# Altium PCB PCB1.PcbDoc
Units mm, origin at the board's own origin, x right, y up, seen from the top; angles counter-clockwise.
Board outline 166.15 x 92.4 mm, 2 copper layers (Top Layer, Bottom Layer); 64 components, 38 nets, 182 pads, 0 vias.
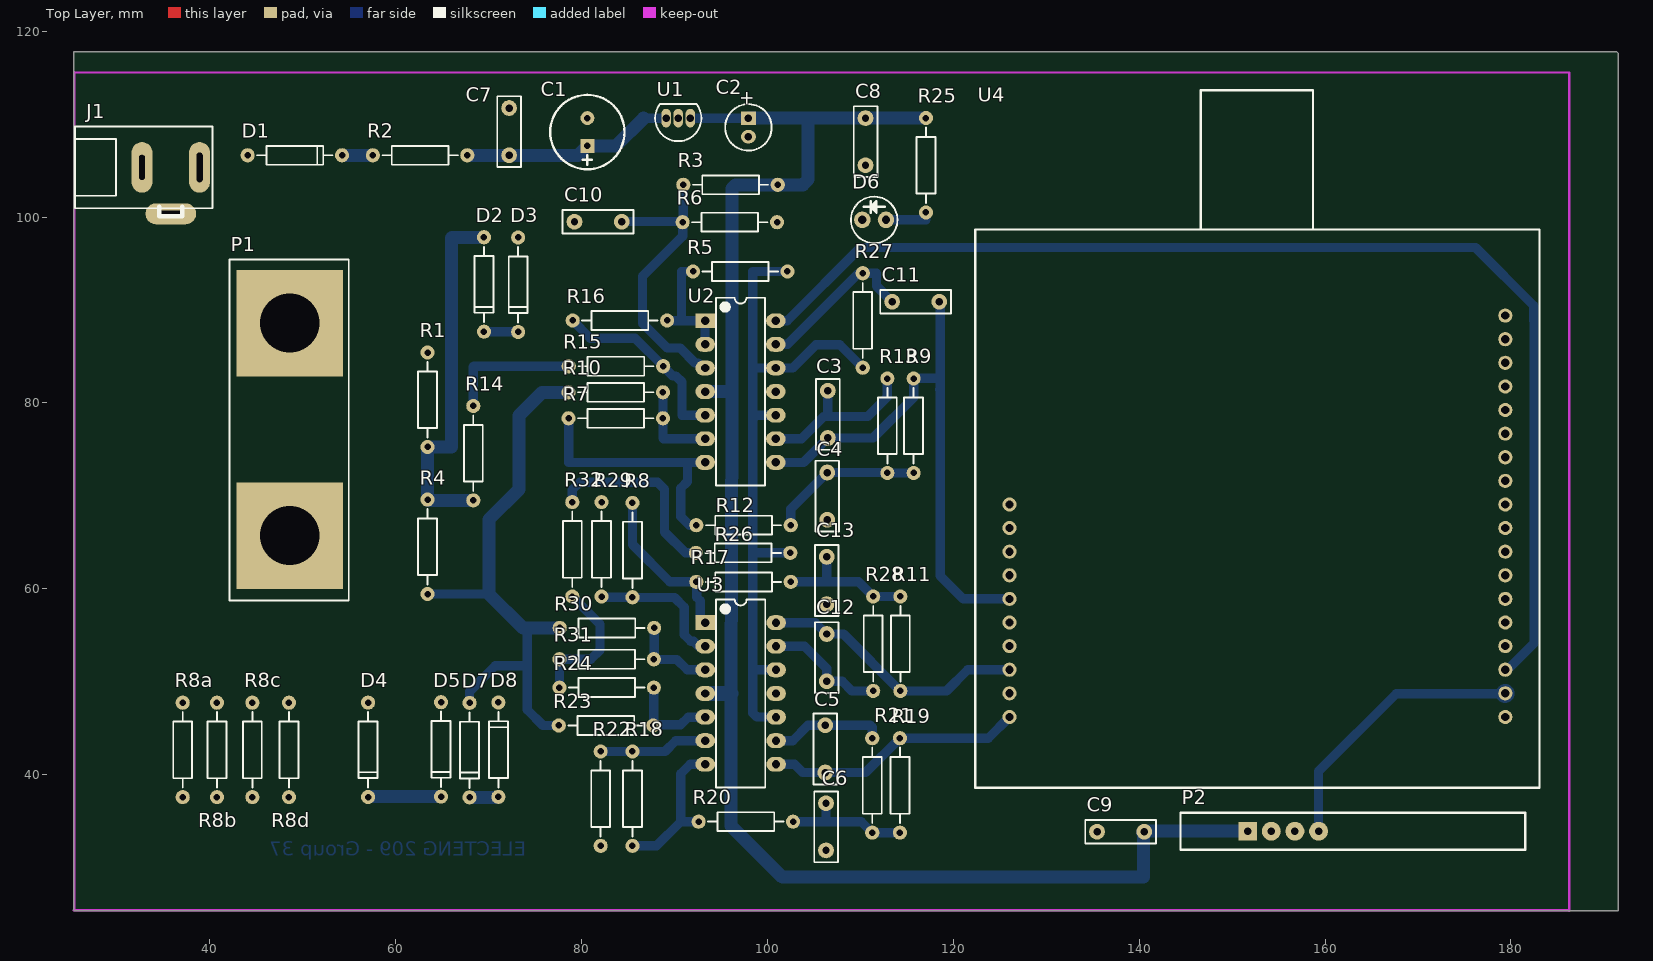
[diagram p0: Top Layer view]
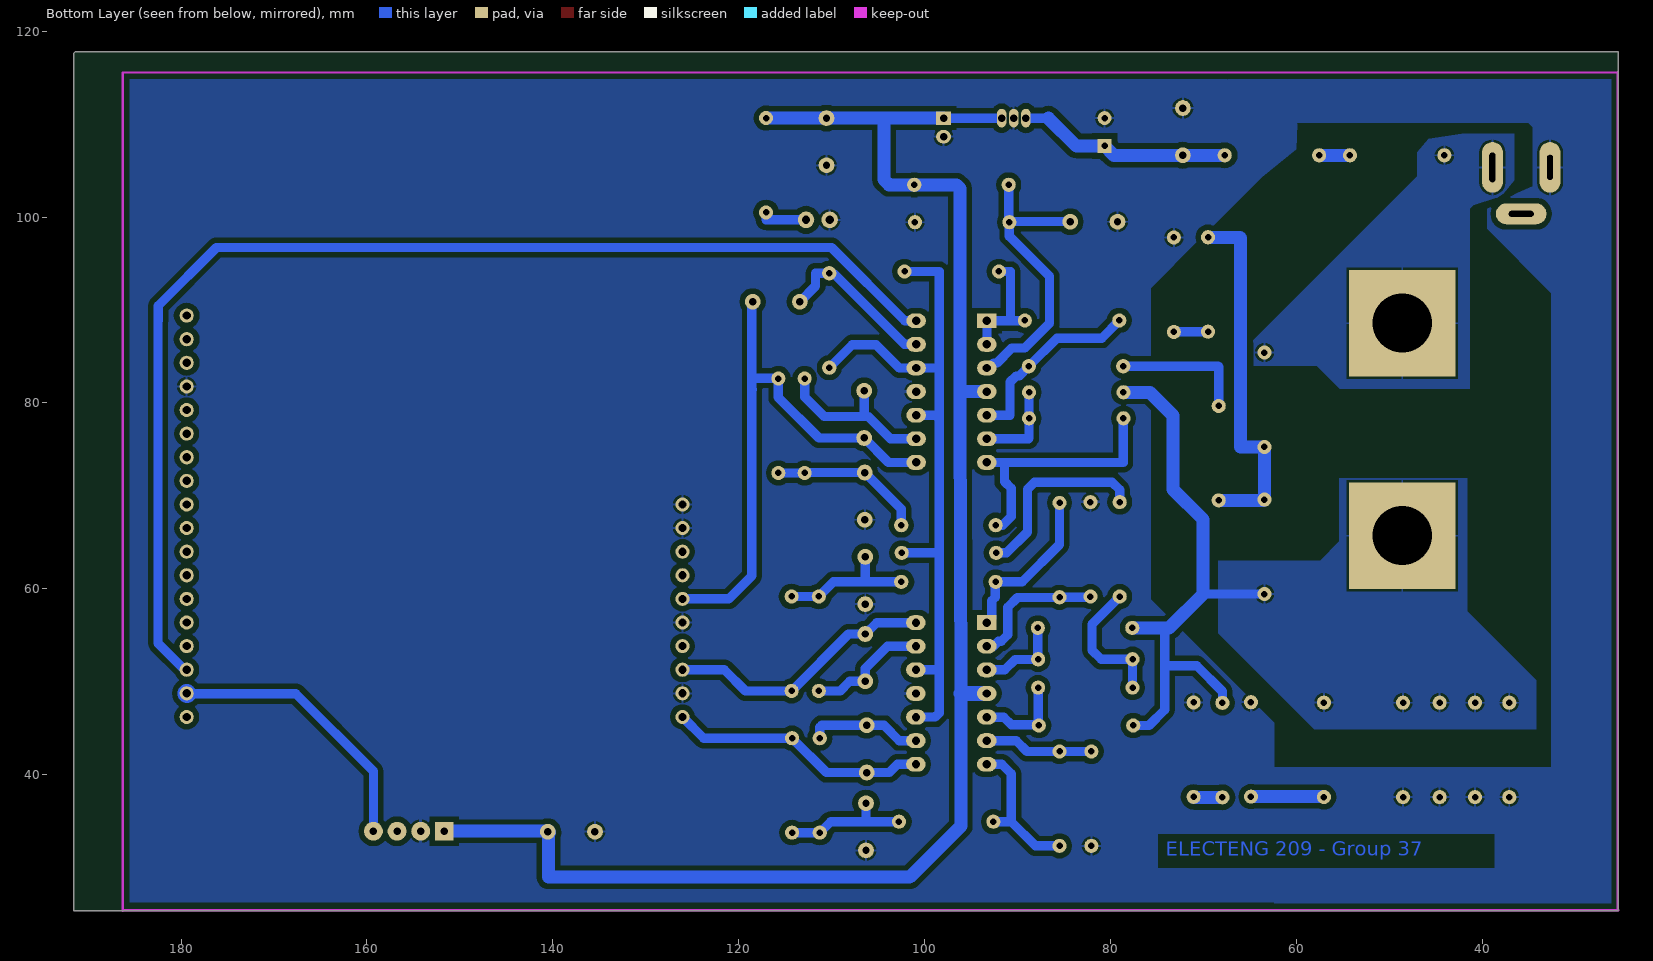
[diagram p1: Bottom Layer view, seen from below]

## Layer stack, top to bottom
Top Solder: solder mask 0.0102, Solder Resist, Dk 3.5
Top Layer: signal copper 0.0356
Dielectric 1: dielectric 0.32, FR-4, Dk 4.8
Bottom Layer: signal copper 0.0356
Bottom Solder: solder mask 0.0102, Solder Resist, Dk 3.5

## Board outline
25.4,25.4 25.375,25.425 25.375,117.775 191.4,117.775 191.525,117.65 191.525,25.375 25.425,25.375 25.4,25.4

## Design rules (kind name [scope] priority, off if disabled: settings)
Clearance [All] p1: gap=0.5
PolygonConnect [All] p1: connectstyle=Relief reliefconductorwidth=0.254 reliefentries=4 polygonreliefangle="90 Angle" airgapwidth=0.254
RoutingVias [All] p1: holewidth=0.711 width=1.27 viastyle="Through Hole" minholewidth=0.711 minwidth=1.27 maxholewidth=0.711 maxwidth=1.27
SolderMaskExpansion [All] p1: expansion=0.102
Width [All] p1: maxlimit=10 minlimit=0.4 preferedwidth=1
30 further rules are at their usual default settings.

## Components (designator, comment, footprint, x,y, rotation, side; value= is the part's Value field where it differs from the comment)
C1 "100u" "CAP-RAD-3mm Pitch" 80.625,107.65 r90 top
C2 "10u" "CAP-RAD-2mm Pitch" 97.95,110.65 r270 top
C3 "2.2n" "FILM CAP-0.2" 106.5,78.775 r90 top
C4 "6.8n" "FILM CAP-0.2" 106.425,69.975 r270 top
C5 "2.2n" "FILM CAP-0.2" 106.225,42.775 r90 top
C6 "6.8n" "FILM CAP-0.2" 106.3,34.4 r270 top
C7 "0.1u" ECE-CAPR0.2x0.1TH 72.2,106.65 r90 top
C8 "0.1u" ECE-CAPR0.2x0.1TH 110.55,110.65 r270 top
C9 "0.1u" "FILM CAP-0.2" 138,33.875 r180 top
C10 "0.1u" "FILM CAP-0.2" 81.775,99.5 r180 top
C11 "470n" "FILM CAP-0.2" 115.95,90.9 r0 top
C12 "2.2n" "FILM CAP-0.2" 106.375,52.6 r270 top
C13 "6.8n" "FILM CAP-0.2" 106.375,60.9 r270 top
D1 "*" AXIAL-DIODE-0.4 49.15,106.65 r0 top
D2 "3.3V" AXIAL-DIODE-0.4 69.5,92.75 r270 top
D3 "3.3V" AXIAL-DIODE-0.4 73.175,92.725 r270 top
D4 "3V3" AXIAL-DIODE-0.4 57.03,42.681 r270 top
D5 "3V3" AXIAL-DIODE-0.4 64.875,42.725 r270 top
D6 "LED" LED 112.75,99.7 r180 top
D7 "3V3" AXIAL-DIODE-0.4 67.95,42.65 r270 top
D8 "3V3" AXIAL-DIODE-0.4 71.05,42.7 r90 top
J1 "AC Source Input Socket" AC-Socket 38.9,105.35 r0 top
P1 "Load connector" "Dual Banana Plug" 48.6,77.15 r270 top
P2 "RF Module MICRF113" "MICRF113 TX" 151.675,33.925 r90 top
R1 "150k" AXIAL-0.4 63.425,80.35 r90 top
R2 "10" AXIAL-0.4 62.625,106.65 r0 top
R3 "10k" AXIAL-0.4 96.025,103.475 r0 top
R4 "12k" AXIAL-0.4 63.425,64.525 r90 top
R5 "0" AXIAL-0.4 97.075,94.15 r0 top
R6 "10k" AXIAL-0.4 95.95,99.45 r180 top
R7 "100k" AXIAL-0.4 83.675,78.35 r180 top
R8 "180k" AXIAL-0.4 85.475,64.175 r270 top
R8a "1.2" AXIAL-0.4 37.084,42.672 r90 top
R8b "1.2" AXIAL-0.4 40.767,42.672 r90 top
R8c "1.2" AXIAL-0.4 44.577,42.672 r90 top
R8d "1.2" AXIAL-0.4 48.514,42.672 r90 top
R9 "5.6k" AXIAL-0.4 115.725,77.55 r90 top
R10 "100k" AXIAL-0.4 83.675,81.15 r0 top
R11 "5.6k" AXIAL-0.4 114.3,54.1 r90 top
R12 "5.6k" AXIAL-0.4 97.425,66.85 r0 top
R13 "12k" AXIAL-0.4 112.9,77.55 r270 top
R14 "22k" AXIAL-0.4 68.35,74.6 r90 top
R15 "68k" AXIAL-0.4 83.7,83.95 r0 top
R16 "100k" AXIAL-0.4 84.125,88.875 r180 top
R17 "5.6k" AXIAL-0.4 97.425,60.75 r180 top
R18 "47k" AXIAL-0.4 85.475,37.425 r90 top
R19 "5.6k" AXIAL-0.4 114.25,38.85 r270 top
R20 "5.6k" AXIAL-0.4 97.675,34.95 r180 top
R21 "12k" AXIAL-0.4 111.275,38.85 r270 top
R22 "8.2k" AXIAL-0.4 82.05,37.425 r90 top
R23 "8.2k" AXIAL-0.4 82.625,45.3 r0 top
R24 "47k" AXIAL-0.4 82.7,49.375 r0 top
R25 "100" AXIAL-0.4 117.05,105.575 r90 top
R26 "0" AXIAL-0.4 97.375,63.875 r180 top
R27 "100k" AXIAL-0.4 110.25,88.875 r270 top
R28 "12k" AXIAL-0.4 111.375,54.1 r90 top
R29 "10k" AXIAL-0.4 82.15,64.25 r90 top
R30 "10k" AXIAL-0.4 82.725,55.8 r0 top
R31 "180k" AXIAL-0.4 82.7,52.425 r0 top
R32 "0" AXIAL-0.4 79,64.25 r270 top
U1 "3.3V Regulator" TO-92 90.4,110.65 r90 top
U2 "MCP6024-I/P" DIP-14 97.1,81.225 r0 top
U3 "MCP6024-I/P" DIP-14 97.115,48.745 r0 top
U4 "ATmega328P Xplained" "ATmeg328P Xplained" 126.05,89.4 r0 top

## Footprints (in the part's own frame and the unit in brackets; to place one, negate y for a bottom-side part, rotate by r counter-clockwise, add the part's x,y. Pads: shape width x height; smd on the part's side, far side on the other; paste and mask are expansions set on the pad)
AC-Socket [mm]
  oval 2.25x5.45 hole 0.635 slot 3.175 at 90 deg: 1(0,0)
  oval 5.45x2.25 hole 0.635 slot 2.667 at 0 deg: 2(-3.1,-5)
  oval 2.25x5.45 hole 0.635 slot 2.667 at 90 deg: 3(-6.2,0)
  silkscreen extent -13.4,-5.25 1.4,4.4, body extent -13.4,-4.4 1.4,4.4, height 10
"ATmeg328P Xplained" [mil]
  round 60 hole 35: 9(0,-800) 10(0,-900) 11(0,-1000) 12(0,-1100) 13(0,-1200) 14(0,-1300) 15(0,-1400) 16(0,-1500) 17(0,-1600) 18(0,-1700) 19(2100,-1700) 20(2100,-1600) 21(2100,-1500) 22(2100,-1400) 23(2100,-1300) 24(2100,-1200) 25(2100,-1100) 26(2100,-1000) 27(2100,-900) 28(2100,-800) 29(2100,-700) 30(2100,-600) 31(2100,-500) 32(2100,-400) 33(2100,-300) 34(2100,-200) 35(2100,-100) 36(2100,0)
  silkscreen extent -145,-2000 2245,955, body extent -145,-2000 2245,955, height 236
AXIAL-0.4 [mil]
  round 60 hole 27.56: 1(-200,0) 2(200,0)
  silkscreen extent -160,-40 160,40, body extent -120,-40 120,40, height 81
AXIAL-DIODE-0.4 [mil]
  round 60 hole 27.56: 1(-200,0) 2(200,0)
  silkscreen extent -160,-40 160,40, body extent -120,-41 120,41, height 82
"CAP-RAD-2mm Pitch" [mm] "Cap 5 X 6.8"
  rect 1.45x1.6 hole 0.8: 1(0,0)
  oval 1.45x1.6 hole 0.8: 2(2,0)
  silkscreen extent -1.5,-2.5 3.5,2.5, body extent -1.48,-2.49 3.5,2.5, height 6
"CAP-RAD-3mm Pitch" [mm]
  rect 1.5x1.5 hole 0.7: 1(0,0)
  round 1.5 hole 0.7: 2(3,0)
  silkscreen extent -2.5,-4 5.5,4, body extent -2.47,-3.99 5.5,3.99, height 10
DIP-14 [mm] "DIP; 14 Leads; Row Spacing 7.62 mm; Pitch 2.54 mm"
  rect 2.1x1.6 hole 0.9: 1(-3.81,7.62)
  oval 2.1x1.6 hole 0.9: 2(-3.81,5.08) 3(-3.81,2.54) 4(-3.81,0) 5(-3.81,-2.54) 6(-3.81,-5.08) 7(-3.81,-7.62) 8(3.81,-7.62) 9(3.81,-5.08) 10(3.81,-2.54) 11(3.81,0) 12(3.81,2.54) 13(3.81,5.08) 14(3.81,7.62)
  silkscreen extent -2.65,-10.1 2.65,10.1, body extent -3.6,-10.1 3.6,10.1, height 5.1
"Dual Banana Plug" [mm] "Connector; 2 Position"
  rect 11.43x11.43 hole 6.35: 1(-11.43,0) 2(11.43,0)
  silkscreen extent -18.29,-6.48 18.41,6.35, body extent -17.38,-5.99 17.43,5.99, height 5.5
ECE-CAPR0.2x0.1TH [mm] "Radial non polarised Capacitor"
  round 1.7 hole 0.8: 1(0,0) 2(5.08,0)
  silkscreen extent -1.27,-1.27 6.35,1.27
"FILM CAP-0.2" [mm]
  round 1.7 hole 0.8: 1(-2.54,0) 2(2.54,0)
  silkscreen extent -3.81,-1.27 3.81,1.27, body extent -3.81,-1.27 3.81,1.27, height 6
LED [mil]
  round 70 hole 35.43: 1(0,0) 2(100,0)
  silkscreen extent -48,-98 148,98
"MICRF113 TX" [mil]
  rect 80x80 hole 32: 1(0,0)
  round 80 hole 32: 2(0,-100) 3(0,-200) 4(0,-300)
  silkscreen extent -79,-1175 79,285, body extent -79,-1181 79,285, height 787
TO-92 [mm] "TO, Flat Index; 3 In-Line, Axial Leads; Body Dia. 4.5mm; Leads 0.51 x 0.48 mm (max)"
  oval 2x1 hole 0.8: 1(0,1.3) 2(0,0) 3(0,-1.3)
  silkscreen extent -2.48,-2.48 1.5,2.48, body extent -2.48,-2.5 1.5,2.5, height 6.86

## Part data
C1: library part "Cap Pol (22uF-100uF)", "Polarized Capacitor (Axial)"
C2: library part "Cap Pol (1uF-10uF)", "Polarized Capacitor (Axial)"
C3 C4 C5 C6 C9 C10 C11 C12 C13: library part CAP, "Capacitor Non Polarised Through Hole"
C7 C8: library part CAP000001, "CAP CER 10pF 50V TH"
D1: library part Diode
D2 D3 D4 D5 D7 D8: library part Zener, "Zener Diode"
D6: "Typical GaAs LED"
J1: library part "AC Input"
P1: library part "Dual Banana Plugs", "M6 Holes"
P2: library part "RF Module", "Vertical Mount RF Module"
R1 R2 R3 R4 R5 R6 R7 R8 R8a R8b R8c R8d R9 R10 R11 R12 R13 R14 R15 R16 R17 R18 R19 R20 R21 R22 R23 R24 R25 R26 R27 R28 R29 R30 R31 R32: library part Res, "Through Hole Resistor"
U1: library part LP2950-33
U2 U3: "Rail-to-Rail Input/Output, 10 MHz Operational Amplifier, 14-Pin PDIP, Industrial Temperature"
U4: "Header, 18-Pin, Dual row"

## Nets (pads, with @x,y where several pads share a name; then routed paths per layer and width w, separated by ;. In a path a pad name is that pad's centre, name@x,y a point inside that pad or via, vN(x,y) a via of type N, cw(c..) or ccw(c..) an arc to the next point about the centre after c; other vN are vias at no path point)
1V65: R5.2 R26.1 R27.2 U2.10 U2.12 U3.10 U3.12 | length 77
  Bottom Layer w1: U2.10 98.825,78.685 98.425,78.285 ; U3.10 98.87,46.205 98.425,46.65 98.425,51.35 ; U3.12 98.49,51.285 98.425,51.35 ; R5.2 98.425,94.15 98.425,83.775 ; R26.1 98.425,63.875 ; R27.2 107.77,86.275 105.225,86.275 102.715,83.765 U2.12 98.435,83.765 98.425,83.775 ; 98.425,51.35 98.425,63.875 ; 98.425,63.875 98.425,78.285 ; 98.425,78.285 98.425,83.775
1V65B: R26.2 R32.1 | length 20.8
  Bottom Layer w1: R32.1 79,70.65 79.825,71.475 88.175,71.475 88.925,70.725 88.925,66.125 91.175,63.875 R26.2
1V65C: R24.1 R31.1 R32.2 | length 14.8
  Bottom Layer w1: R24.1 R31.1 81,52.425 81.975,53.4 81.975,56.195 R32.2
1V65S: R5.1 R16.1 U2.1 U2.2 | length 13.1
  Bottom Layer w1: R16.1@89.235,88.845 90.75,88.845 ; R5.1 90.75,94.15 90.75,88.845 ; U2.2 U2.1 90.75,88.845
3V3: C2.1 C8.1 C9.1 P2.1 R3.2 R25.2 U1.3 U2.4 U3.4 | length 177.5
  Bottom Layer w1: U1.3 C2.1
  Bottom Layer w1.4: U2.4 96.15,81.225 96.175,81.2 ; C2.1 104.375,110.65 ; C8.1 104.375,110.65 ; C8.1@110.555,110.655 R25.2 ; C9.1@140.45,33.785 140.45,28.975 101.6,28.975 96.1,34.475 96.1,48.775 96.175,79.513 96.175,81.2 ; C9.1@140.59,33.925 P2.1 ; 96.175,81.2 96.175,103.075 96.575,103.475 R3.2 103.8,103.475 104.375,104.05 104.375,110.65
  Bottom Layer w1.6: U3.4 96.07,48.745 ; C9.1@140.45,33.785 C9.1 C9.1@140.59,33.925
GND: C1.2 C2.2 C4.2 C6.2 C7.2 C8.2 C9.2 C10.2 C13.2 D3.1 D5.1 D6.2 D8.2 J1.3 P2.2 R6.1 R8a.1 R8b.1 R8c.1 R8d.1 R22.1 R29.2 U1.2 U2.11 U3.11 U4.9 U4.10 U4.14 U4.17 U4.33
I-HIGAIN: C12.1 R11.1 U3.14 U4.16 | length 29.1
  Bottom Layer w1: U3.14 105.15,56.365 C12.1 108.18,55.14 R11.1 119.27,49.02 121.55,51.3 U4.16
IADC: C5.1 R19.1 U3.8 U4.18 | length 28
  Bottom Layer w1: U3.8 102.9,41.125 103.79,40.235 C5.1 110.555,40.235 R19.1 123.76,43.93 U4.18
ISENS: D4.1 D7.1 P1.2 R4.1 R8a.2 R8b.2 R8c.2 R8d.2 R10.1 R23.1 R30.1 | length 64.1
  Bottom Layer w1: R4.1 70.03,59.445 ; D7.1 67.95,48.95 70.725,51.725 74.15,51.725 ; 74.15,55.8 74.15,51.725 ; R23.1 75.85,45.3 74.15,47 74.15,51.725
  Bottom Layer w1.4: R30.1 73.675,55.8 70.03,59.445 70.03,67.455 73.275,70.7 73.275,78.675 75.75,81.15 R10.1
NetC1_1: C1.1 C7.1 R2.2 U1.1 | length 22.6
  Bottom Layer w1: 86.675,110.65 U1.1@88.65,110.65
  Bottom Layer w1.4: R2.2 C7.1 79.625,106.65 C1.1 83.675,107.65 86.675,110.65
NetC3_2: C3.2 R13.1 U2.9 | length 18.2
  Bottom Layer w1: U2.9 103.652,76.145 106.057,78.55 110.8,78.55 112.9,80.65 R13.1 ; 106.5,78.993 C3.2
NetC4_1: C4.1 R9.1 R12.2 R13.2 | length 16.6
  Bottom Layer w1: R12.2 102.505,68.595 C4.1 112.855,72.515 R13.2 R9.1
NetC5_2: C5.2 R21.1 U3.9 | length 12.3
  Bottom Layer w1: U3.9 102.715,43.665 104.365,45.315 C5.2 111.06,45.315 111.275,45.1 R21.1
NetC6_1: C6.1 R19.2 R20.1 R21.2 | length 14
  Bottom Layer w1: R20.1 106.275,34.95 ; C6.1 106.3,34.975 106.275,34.95 ; R21.2@111.275,33.845 R21.2@111.3,33.82 ; R19.2 R21.2 110.095,34.95 106.275,34.95
NetC10_1: C10.1 R3.1 R6.2 U2.3 | length 32
  Bottom Layer w1: C10.1 84.34,99.525 90.945,99.525 R3.1 ; R6.2 90.87,97.945 86.55,93.625 86.55,88.584 89.222,85.912 90.605,85.912 92.212,84.305 92.545,84.305 93.085,83.765 U2.3
NetC11_1: C11.1 R27.1 U2.13 | length 17.2
  Bottom Layer w1: U2.13 102.155,86.305 R27.1@109.725,93.875 ; R27.1 111.725,93.955 111.725,92.585 C11.1
NetC12_2: C12.2 R28.1 U3.13 | length 13.2
  Bottom Layer w1: U3.13 103.975,53.825 106.375,51.425 C12.2 108.04,50.06 109.08,49.02 R28.1
NetC13_1: C13.1 R11.2 R17.1 R28.2 | length 15.1
  Bottom Layer w1: R17.1 106.35,60.75 ; C13.1 106.375,60.775 106.35,60.75 ; R11.2 R28.2 109.805,60.75 106.35,60.75
NetD1_2: D1.2 R2.1 | length 3.3
  Bottom Layer w1.4: D1.2 R2.1
NetD2_2: D2.2 D3.2 | length 3.7
  Bottom Layer w1: D2.2 D3.2@73.15,87.67
NetD4_2: D4.2 D5.2 | length 7.9
  Bottom Layer w1: D4.2 D4.2@57.074,37.645
  Bottom Layer w1.4: D4.2@57.074,37.645 D5.2
NetD6_1: D6.1 R25.1 | length 5.1
  Bottom Layer w1: D6.1 117.05,99.7 R25.1
NetD7_2: D7.2 D8.1 | length 3.1
  Bottom Layer w1: D8.1@71,37.57 D8.1
  Bottom Layer w1.4: D7.2 D8.1@71,37.57
NetP2_4: P2.4 U4.20 | length 30
  Bottom Layer w1: P2.4 159.295,40.37 167.645,48.72 U4.20@179.35,48.72
  Bottom Layer w2: U4.20@179.35,48.72 U4.20
NetR7_1: R7.1 R10.2 U2.6 | length 9.5
  Bottom Layer w1: R10.2 R7.1 88.755,76.195 88.805,76.145 U2.6
NetR7_2: R7.2 R12.1 U2.7 | length 27.6
  Bottom Layer w1: R7.2 78.63,78.315 78.63,73.605 91.405,73.605 ; R12.1@92.315,66.82 91.63,66.82 90.675,67.775 90.675,70.815 91.405,71.545 91.405,73.605 ; U2.7 91.405,73.605
NetR8_1: R8.1 R17.2 U3.1 | length 17.8
  Bottom Layer w1: R8.1 85.475,64.775 89.475,60.775 92.32,60.775 R17.2 92.39,60.705 92.39,59.089 92.755,58.724 92.755,56.849 93.239,56.365 U3.1
NetR8_2: R8.2 R29.1 U3.2 | length 15.1
  Bottom Layer w1: R29.1 82.225,59.095 R8.2 85.495,59.075 90,59.075 91.055,58.02 91.055,55.068 91.758,54.365 92.041,54.365 92.581,53.825 U3.2
NetR14_2: R14.2 R15.1 | length 14.5
  Bottom Layer w1: R14.2 68.35,83.9 68.4,83.95 R15.1
NetR15_2: R15.2 R16.2 U2.5 | length 20.6
  Bottom Layer w1: R16.2 80.945,86.975 85.755,86.975 R15.2 89.818,82.912 90.142,82.912 90.8,82.254 90.8,78.685 U2.5
NetR18_1: R18.1 R20.2 U3.7 | length 16.4
  Bottom Layer w1: R18.1 88.07,32.345 90.675,34.95 ; R20.2 90.675,34.95 ; U3.7 91.696,41.125 90.675,40.104 90.675,34.95
NetR18_2: R18.2 R22.2 U3.6 | length 11.7
  Bottom Layer w1: R22.2 R18.2 88.98,42.505 90.14,43.665 U3.6
NetR23_2: R23.2 R24.2 U3.5 | length 10.1
  Bottom Layer w1: R24.2 87.78,45.375 R23.2 87.77,45.365 90.64,45.365 91.475,46.2 93.3,46.2 U3.5
NetR30_2: R30.2 R31.2 U3.3 | length 9.4
  Bottom Layer w1: R30.2 87.805,52.45 R31.2 87.805,52.4 90.25,52.4 91.365,51.285 U3.3
VADC: C3.1 C11.2 R9.2 U2.8 U4.13 | length 60.7
  Bottom Layer w1: U2.8 103.87,73.605 C3.1 111.36,76.235 115.725,80.6 R9.2 115.77,82.675 118.575,82.675 ; C11.2 118.575,90.815 118.575,82.675 ; 118.545,81.455 118.575,81.425 ; U4.13 121.055,58.92 118.575,61.4 118.575,81.425 ; 118.575,81.425 118.575,82.675
VIN: D1.1 J1.1 P1.1 R1.2
VSENS: D2.1 R1.1 R4.2 R14.1 | length 39.2
  Bottom Layer w1: R4.2 R4.2@63.51,69.52 ; 66.02,97.77 66.08,97.83
  Bottom Layer w1.4: R4.2 R1.1 66.02,75.27 66.02,97.77 ; R4.2@63.51,69.52 R14.1 ; 66.08,97.83 D2.1
VTRIGGER: U2.14 U4.21 | length 128
  Bottom Layer w1: U2.14 102.12,88.845 110,96.725 176.175,96.725 182.45,90.45 182.45,88.832 182.475,88.807 182.475,54.15 179.625,51.3 U4.21
pads on no net: J1.2 P2.3 U4.11 U4.12 U4.15 U4.19 U4.22 U4.23 U4.24 U4.25 U4.26 U4.27 U4.28 U4.29 U4.30 U4.31 U4.32 U4.34 U4.35 U4.36

## Polygon pours and split planes (outlines as drawn)
GND on Bottom Layer "Bottom Layer-No Net 1" (solid, pour order 20): 62.35,26.259 185.834,26.259 185.85,26.275 185.6,26.525 185.6,114.975 67.659,114.975 67.4,114.716 67.4,110.144 59.994,110.144 59.95,110.1 59.875,110.025 59.994,107.31 63.725,104.3 75.525,92.5 75.675,92.35 75.675,58.9 62.35,45.575
ISENS on Bottom Layer "Bottom Layer-No Net" (solid, pour order 10): 41.6,71.9 41.625,71.925 55.375,71.925 55.375,65.1 57.45,63.025 58.05,63.025 63.075,63.025 68.4,63.025 68.4,55.25 58.925,45.775 58.05,44.9 52.575,44.9 34.2,44.9 34.2,50.05 34.2,50.15 41.575,57.525 41.6,57.55
VIN on Bottom Layer "Bottom Layer-No Net" (solid, pour order 4): 36.55,108.25 36.55,105.425 36.55,103.988 37.743,102.489 38.402,102.072 38.5,102.063 40.975,101.275 41.35,100.9 41.35,81.55 55.35,81.55 55.4,81.6 57.8,84 64.6,84 64.6,86.55 64.7,86.65 46.975,104.375 46.975,106.992 45.731,108.435 42.188,108.962 36.55,108.962
GND on Bottom Layer "Bottom Layer-No Net" (solid, pour order 5): 67.4,115.55 67.4,110.144 35.019,110.144 34.6,109.725 34.55,109.675 34.55,103.3 36.164,102.632 39.45,100.875 39.45,98.725 32.55,91.825 32.55,40.8 62.025,40.8 62.35,40.8 62.35,25.4 25.4,25.4 25.4,115.57 67.38,115.57

## Keep-outs
Keep-Out Layer:
  lines w0.254: 25.375,25.425 186.2,25.425 186.25,25.375 186.25,115.525 186.225,115.55 25.425,115.55 25.4,115.575 25.4,25.4

## Other copper
Bottom Layer:
  text "ELECTENG 209 - Group 37" at 74.05,31.275 h1.52

## Text inside footprints (layer, text, board x,y; h text height)
C2: Top Overlay "+" at 97.2,113.625 h1.5 r270